# EAGLE board Master_Micro_Circuit_Manual (EAGLE 9.3.0)
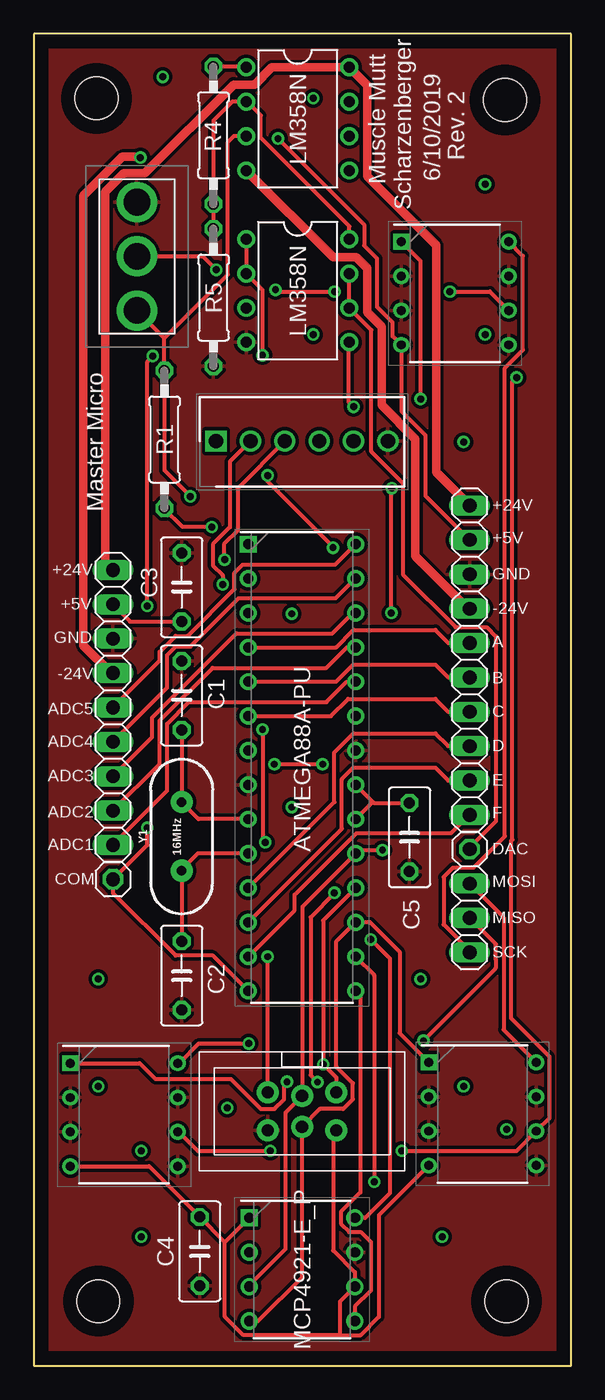
[diagram p0: board, top side]
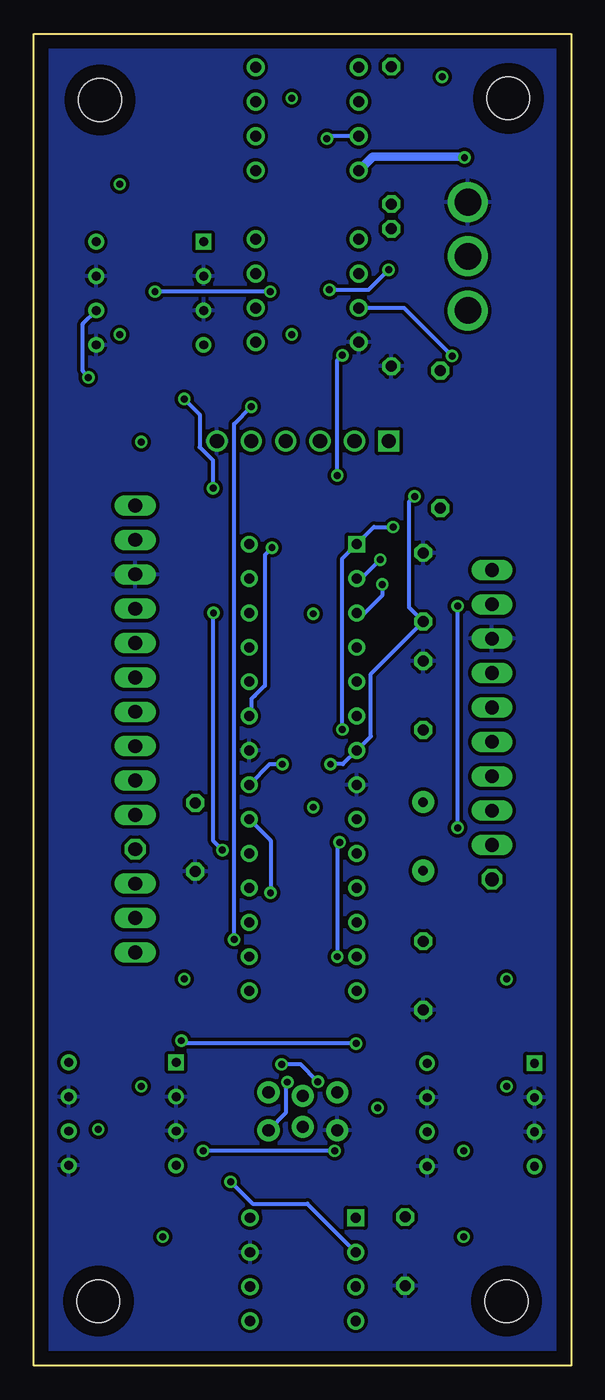
[diagram p1: board, bottom side, seen from below]

Size 39.69 x 98.42 mm. Coordinates in mm from the lower left corner, seen from the top.
Outline: 0,0 39.69,0 39.69,98.42 0,98.42 0,0
Copper layers (1*16): Top 0.035mm / dielectric 1.5mm / Bottom 0.035mm
Design rules "default": minimum track width 6mil, minimum drill 0.35mm, track to track 6mil, track to pad 6mil, pad to pad 6mil, via to via 6mil, smd to smd 6mil, copper to edge 40mil, drill to drill 6mil, minimum pad ring 10mil, minimum via ring 8mil, stop-mask expansion 4mil, vias tented up to drill 0mil, thermal gap 10mil
Net classes: 0 default: width 0.305 mm, drill 0.508 mm, clearance 0.254 mm
Holes 3.17 mm at 4.76,4.76 34.92,4.76 4.64,93.66 34.8,93.54

## Footprints (pad centres in the part's own frame; a part is rotated, then mirrored left to right if it is on the bottom)
C050-030X075 = drill 0.813 octagon: 1 -2.54,0; 2 2.54,0
DIP794W53P254L3467H457Q28N = drill 0.733 pad 1.133 square: 1 -3.969,16.51 | drill 0.733 pad 1.133: 2 -3.969,13.97; 3 -3.969,11.43; 4 -3.969,8.89; 5 -3.969,6.35; 6 -3.969,3.81; 7 -3.969,1.27; 8 -3.969,-1.27; 9 -3.969,-3.81; 10 -3.969,-6.35; 11 -3.969,-8.89; 12 -3.969,-11.43; 13 -3.969,-13.97; 14 -3.969,-16.51; 15 3.969,-16.51; 16 3.969,-13.97; 17 3.969,-11.43; 18 3.969,-8.89; 19 3.969,-6.35; 20 3.969,-3.81; 21 3.969,-1.27; 22 3.969,1.27; 23 3.969,3.81; 24 3.969,6.35; 25 3.969,8.89; 26 3.969,11.43; 27 3.969,13.97; 28 3.969,16.51
DIP794W46P254L959H508Q8N = drill 0.655 pad 1.055 square: 1 -3.97,3.81 | drill 0.655 pad 1.055: 2 -3.97,1.27; 3 -3.97,-1.27; 4 -3.97,-3.81; 5 3.97,-3.81; 6 3.97,-1.27; 7 3.97,1.27; 8 3.97,3.81
DIP781W56P254L950H533Q8N = drill 0.759 pad 1.159 square: 1 -3.905,3.81 | drill 0.759 pad 1.159: 2 -3.905,1.27; 3 -3.905,-1.27; 4 -3.905,-3.81; 5 3.905,-3.81; 6 3.905,-1.27; 7 3.905,1.27; 8 3.905,3.81
DIL08 = drill 0.813 pad 1.27: 1 -3.81,-3.81; 2 -1.27,-3.81; 3 1.27,-3.81; 4 3.81,-3.81; 5 3.81,3.81; 6 1.27,3.81; 7 -1.27,3.81; 8 -3.81,3.81
AVRISP-BOX = drill 0.9 pad 1.626: 1 -1.397,2.54; 2 1.397,2.54; 3 -1.143,0; 4 1.143,0; 5 -1.397,-2.54; 6 1.397,-2.54
SHDR6W87P0X254_1X6_1509X635X10 = drill 1.05 pad 1.575 square: 1 0,0 | drill 1.05 pad 1.575: 2 2.54,0; 3 5.08,0; 4 7.62,0; 5 10.16,0; 6 12.7,0
1X04 = drill 1.016 long: 1 -3.81,0; 2 -1.27,0; 3 1.27,0; 4 3.81,0
1X05 = drill 1.016 long: 1 -5.08,0; 2 -2.54,0; 3 0,0; 4 2.54,0; 5 5.08,0
1X01 = drill 1.016 octagon: 1 0,0
1X06 = drill 1.016 long: 1 -6.35,0; 2 -3.81,0; 3 -1.27,0; 4 1.27,0; 5 3.81,0; 6 6.35,0
1X03 = drill 1.016 long: 1 -2.54,0; 2 0,0; 3 2.54,0
0207/10 = drill 0.813 octagon: 1 -5.08,0; 2 5.08,0
1031211PEV = drill 1.972 pad 2.958: 1 0,0; 2 4,0; 3 8,0
HC49US = drill 0.7 pad 1.651: 1 -2.54,0; 2 2.54,0

## Placement (x,y rotation side)
C1  [C050-030X075]  10.92,49.53 90 top
C2  [C050-030X075]  10.92,28.83 270 top
C3  [C050-030X075]  10.92,57.53 90 top
C4  [C050-030X075]  12.26,8.45 270 top
C5  [C050-030X075]  27.75,39.05 270 top
IC1  ATMEGA88A-PU  [DIP794W53P254L3467H457Q28N]  19.81,44.2 0 top
IC2  TS12A4515P  [DIP794W46P254L959H508Q8N]  31.11,79.25 0 top
IC3  TS12A4515P  [DIP794W46P254L959H508Q8N]  6.67,18.54 0 top
IC4  MCP4921-E_P  [DIP781W56P254L950H533Q8N]  19.81,7.11 0 top
IC5  LM358N  [DIL08]  19.49,92.14 270 top
IC6  LM358N  [DIL08]  19.49,79.44 270 top
IC7  TS12A4515P  [DIP794W46P254L959H508Q8N]  33.15,18.61 0 top
ISP1  AVRISP-BOX  [AVRISP-BOX]  19.81,18.8 270 top
J1  22-23-2061  [SHDR6W87P0X254_1X6_1509X635X10]  13.46,68.33 0 top
JP1  [1X04]  5.84,54.99 270 top
JP2  [1X05]  5.84,43.56 270 top
JP3  [1X01]  5.84,35.94 0 top
JP4  [1X04]  32.19,59.75 270 top
JP5  [1X06]  32.19,47.05 270 top
JP6  [1X01]  32.19,38.16 0 top
JP7  [1X03]  32.19,33.08 270 top
R1  [0207/10]  9.65,68.45 270 top
R4  [0207/10]  13.27,90.93 270 top
R5  [0207/10]  13.27,78.93 270 top
S1  103-1211P-EV  [1031211PEV]  7.62,85.98 270 top
Y1  16MHz  [HC49US]  10.92,39.12 90 top

## Library data of the parts
C1-C5 ISP1 = adafruit
IC1 = SamacSys_Parts; DESCRIPTION: ATMEGA88A-PU, 8 bit AVR Microcontroller 20MHz 512 B, 8 kB Flash, 1 kB RAM, I2C 28-Pin PDIP; HEIGHT: 4.572mm; MANUFACTURER_NAME: Microchip; MANUFACTURER_PART_NUMBER: ATMEGA88A-PU; MOUSER_PART_NUMBER: 556-ATMEGA88A-PU
IC2 IC3 IC7 = SamacSys_Parts; DESCRIPTION: Low-Voltage, Low On-State Resistance SPST CMOS Analog Switches; HEIGHT: 5.08mm; MANUFACTURER_NAME: Texas Instruments; MANUFACTURER_PART_NUMBER: TS12A4515P
IC4 = SamacSys_Parts; DESCRIPTION: Microchip MCP4921-E/P, 12 bit Serial DAC, 8-Pin PDIP; HEIGHT: 5.334mm; MANUFACTURER_NAME: Microchip; MANUFACTURER_PART_NUMBER: MCP4921-E/P; MOUSER_PART_NUMBER: 579-MCP4921-E/P
IC5 IC6 = linear
J1 = SamacSys_Parts; DESCRIPTION: 2.54mm,header,KK,vert,Sn,frictn lock,6w Molex KK 254 Series, Series Number 6373, 2.54mm Pitch 6 Way 1 Row Straight PCB Header, Through Hole, Solder Termination; HEIGHT: 10.67mm; MANUFACTURER_NAME: Molex; MANUFACTURER_PART_NUMBER: 22-23-2061; MOUSER_PART_NUMBER: 538-22-23-2061
JP1-JP7 = pinhead
R1 R4 R5 = rcl; SPICEPREFIX: R
S1 = SamacSys_Parts; DESCRIPTION: Slide Switches SPDT 0.5A 50VDC; HEIGHT: 11mm; MANUFACTURER_NAME: Mountain Switch; MANUFACTURER_PART_NUMBER: 103-1211P-EV; MOUSER_PART_NUMBER: 103-1211P-EV; MOUSER_PRICE-STOCK: https://www.mouser.com/Search/Refine.aspx?Keyword=103-1211P-EV
Y1 = SparkFun-Clocks; PROD_ID: XTAL-08181; SF_ID: COM-00536

## Nets
+5V: C3.1 C4.1 C5.1 IC1.7 IC1.20 IC1.21 IC2.4 IC3.4 IC4.1 IC4.6 IC5.3 IC7.4 ISP1.2 JP1.2 JP4.2 R1.1 S1.3
+24V: IC5.8 JP1.1 JP4.1
-24V: IC5.4 JP1.4 JP4.4
A: IC1.4 JP5.1
ADC: IC1.23 IC6.1 IC6.2
B: IC1.5 JP5.2
C: IC1.6 JP5.3
CS: IC1.16 IC4.2
D: IC1.11 JP5.4
DAC: IC4.8 IC6.5
DEMUX_COM: IC6.6 IC6.7 JP6.1
E: IC1.12 JP5.5
F: IC1.13 JP5.6
GND: C1.2 C2.2 C3.2 C4.2 C5.2 IC1.8 IC1.22 IC2.2 IC2.3 IC2.5 IC2.7 IC3.2 IC3.3 IC3.5 IC3.7 IC4.7 IC6.4 IC7.2 IC7.3 IC7.5 IC7.7 ISP1.6 J1.6 JP1.3 JP4.3 R5.2 S1.1
MISO: IC1.18 IC3.1 ISP1.1
MISO_OUT: IC3.8 JP7.2
MOSI: IC1.17 IC4.4 IC7.1 ISP1.4
MOSI_OUT: IC7.8 JP7.1
MUX_COM: IC1.14 IC6.3 JP3.1
N$1: C2.1 IC1.10 Y1.1
N$2: IC5.1 R4.1
N$3: IC2.6 IC3.6 IC7.6 S1.2
N$4: IC5.2 IC6.8 R4.2 R5.1
N$5: IC1.15 IC4.5
N$11: C1.1 IC1.9 Y1.2
PC1: IC1.24 JP2.5
PC2: IC1.25 JP2.4
PC3: IC1.26 JP2.3
PC4: IC1.27 JP2.2
PC5: IC1.28 JP2.1
RESET: IC1.1 ISP1.5 R1.2
RX: IC1.2 J1.3
SCK: IC1.19 IC2.1 IC4.3 ISP1.3
SCK_OUT: IC2.8 JP7.3
TX: IC1.3 J1.2

## Tracks (layer width: path | path; a pad name or v marks a point on that pad's centre or on a via)
+5V  (via drill 0.51)
  Top 0.305: 22.61,2.26 15.48,2.26 14.11,3.62 14.11,9.13 | ISP1.2 22.12,17.16 22.12,8.51 23.72,6.91 IC4.6 22.61,4.73 22.61,2.26 | IC1.21 25.05,41.66 | IC1.20 25.05,41.66 | 14.11,9.13 C4.1 8.51,14.73 IC3.4 | IC4.1 14.11,9.13 | 25.05,41.66 25.11,41.59 C5.1 | v18.04,90.69 24.39,84.33 24.39,82.79 25.34,81.84 25.34,78.26 26.51,77.09 26.51,76.07 IC2.4 27.14,70.55 28.92,68.77 28.92,64.29 JP4.2 | v11.56,64.24 11.56,64.26 9.65,66.17 R1.1 9.65,75.95 | C3.1 7.11,54.99 JP1.2 | IC5.3 14.78,90.87 14.34,90.42 14.34,80.63 9.65,75.95 | 22.61,2.26 24.15,2.26 25.49,3.61 25.49,11.11 IC7.4 | v22.2,34.95 22.2,34.9 20.44,33.13 20.44,21.47 v20.95,20.95 | S1.3 9.65,75.95 | v17.77,44.45 v21.33,44.45
  Bottom 0.305: IC5.3 17.86,90.87 v18.04,90.69 | v11.56,64.24 v11.57,64.24 11.99,63.81 11.99,56.06 C3.1 14.8,51.12 14.8,46.51 IC1.7 16.86,44.45 v17.77,44.45 | v22.2,34.95 22.2,38.81 IC1.20 | v20.95,20.95 21.08,20.83 21.08,18.67 ISP1.2 | IC1.21 22.26,44.45 v21.33,44.45
+24V
  Top 0.61: JP1.1 5.28,59.36 5.28,86.75 6.65,88.12 8.21,88.12 14.76,94.67 16.31,94.67 17.59,95.95 IC5.8 24.62,94.63 24.62,87.9 29.72,82.8 29.72,66.04 JP4.1
-24V  (via drill 0.51)
  Top 0.61: IC5.4 15.7,88.33 22.1,81.93 23.81,81.93 24.62,81.11 24.62,77.86 25.69,76.8 25.69,70.99 28.19,68.49 28.19,59.82 32.07,55.94 JP4.4 | JP1.4 5.71,51.18 3.66,53.24 3.66,86.45 6.54,89.34 7.82,89.34 v7.87,89.28
  Bottom 0.61: IC5.4 14.67,89.34 7.94,89.34 v7.87,89.28
A
  Top 0.305: IC1.4 22.33,53.09 23.61,54.37 29.66,54.37 30.63,53.4 JP5.1
ADC  (via drill 0.51)
  Top 0.305: v17.27,65.79 17.27,65.34 22.1,60.52 v22.1,60.45 | IC6.1 IC6.2 16.89,79.5 v16.89,74.68
  Bottom 0.305: IC1.23 23.62,48.16 23.62,49.28 23.38,49.52 23.36,49.52 22.63,50.25 22.63,59.92 v22.1,60.45 | v17.27,65.79 17.27,74.3 v16.89,74.68
B
  Top 0.305: IC1.5 22.33,50.55 23.6,51.82 29.65,51.82 30.61,50.86 JP5.2
C
  Top 0.305: IC1.6 21.95,48.01 23.22,49.28 29.65,49.28 30.61,48.32 JP5.3
CS  (via drill 0.51)
  Top 0.305: IC1.16 25.15,28.86 v25.15,13.59
  Bottom 0.305: IC4.2 19.49,11.96 23.52,11.96 v25.15,13.59
D
  Top 0.305: IC1.11 22.2,41.66 22.2,45.33 23.6,46.74 29.65,46.74 30.61,45.78 JP5.4
DAC  (via drill 0.51)
  Top 0.305: v24.89,31.5 26.31,30.07 26.31,12.76 24.47,10.92 IC4.8 | v23.62,70.87 23.24,71.25 23.24,75.56 IC6.5
  Bottom 0.305: v24.89,31.5 24.89,69.6 v23.62,70.87
DEMUX_COM
  Top 0.305: IC6.7 IC6.6 24.94,76.53 24.94,67.56 27.3,65.2 27.3,58.42 31.15,54.57 33.44,54.57 34.12,53.89 34.12,40.22 32.19,38.29 JP6.1
E
  Top 0.305: IC1.12 22.75,39.68 22.75,43.35 23.6,44.2 29.65,44.2 30.61,43.24 JP5.5
F
  Top 0.305: IC1.13 19.27,33.66 19.27,34.79 23.84,39.36 30.84,39.36 JP5.6
GND
  pour Top: -1.27,99.69 -1.27,-1.27 41.27,-1.27 41.27,99.69
  pour Bottom: -1.27,99.69 -1.27,-1.27 41.34,-1.27 41.34,99.69
MISO  (via drill 0.51)
  Top 0.305: IC1.18 21.38,32.9 v21.38,22.27 22.35,21.3 ISP1.1 | IC3.1 7.81,22.35 8.98,21.18 14.56,21.18 16.77,18.97 17.78,18.97 18.49,19.69 18.49,20.77 v18.7,20.98
  Bottom 0.305: v18.7,20.98 19.99,22.27 v21.38,22.27
MISO_OUT  (via drill 0.51)
  Top 0.305: IC3.8 10.73,22.35 12.19,23.81 v15.88,23.81 | v28.79,24.03 34.12,29.36 34.12,30.06 34.12,31.15 JP7.2
  Bottom 0.305: v28.79,24.03 28.57,23.81 v15.88,23.81
MOSI
  Top 0.305: IC4.4 16.57,3.3 19.81,6.55 ISP1.4 21.13,18.97 22.86,18.97 23.57,19.69 23.57,20.87 22.35,22.09 22.35,31.37 23.75,32.77 IC1.17 24.84,32.77 27.02,30.59 27.02,24.57 IC7.1
MOSI_OUT
  Top 0.305: IC7.8 34.7,24.83 34.7,33.11 JP7.1
MUX_COM  (via drill 0.51)
  Top 0.305: IC1.14 13.23,30.3 10.48,30.3 5.84,34.94 JP3.1 8.38,38.48 v8.38,39.75 | v8.38,56.13 8.38,74.21 v8.79,74.61
  Bottom 0.305: v8.38,39.75 v8.38,56.13 | v8.79,74.61 12.33,78.16 15.67,78.16 IC6.3
N$1
  Top 0.305: IC1.10 12.1,37.85 10.92,36.67 Y1.1 C2.1
N$2
  Top 0.305: IC5.1 15.62,96.01 R4.1
N$3  (via drill 0.51)
  Top 0.305: v17.46,15.88 12.12,15.88 10.72,17.27 IC3.6 | v27.18,15.88 35.66,15.88 IC7.6 | IC7.6 38.1,18.32 38.1,20.29 38.1,22 38.1,22.01 38.1,22.82 35.26,25.67 35.26,38.79 35.36,38.88 35.36,72.72 v35.66,73.03 | IC7.6 | S1.2 12.49,81.98 v13.47,80.99 | v30.73,79.38 33.69,79.38 IC2.6 | v17.85,79.51 17.98,79.38 v22.23,79.38
  Bottom 0.305: v17.46,15.88 v27.18,15.88 | v35.66,73.03 35.66,73.09 36.07,73.5 36.07,76.99 IC2.6 | v17.85,79.51 14.96,79.51 v13.47,80.99 | v22.23,79.38 v30.73,79.38
N$4
  Top 0.305: R5.1 R4.2 13.27,92.01 14.67,93.41 IC5.2 15.75,93.41 16.76,92.39 16.76,90.74 23.3,84.2 IC6.8
N$5
  Top 0.305: IC1.15 24.13,27.34 24.13,12.81 22.68,11.35 22.68,10.49 23.29,9.88 24.15,9.88 24.89,9.14 24.89,5.55 23.72,4.37 IC4.5
N$6  (via drill 0.51)
  other vias: 19.05,55.56
N$7  (via drill 0.51)
  other vias: 14.29,19.05
N$8  (via drill 0.51)
  other vias: 7.94,9.53
N$9  (via drill 0.51)
  other vias: 30.16,9.53
N$10  (via drill 0.51)
  other vias: 4.76,28.57
N$11
  Top 0.305: IC1.9 12.16,40.39 10.92,41.62 Y1.2 C1.1
N$12  (via drill 0.51)
  other vias: 9.53,95.25
N$13  (via drill 0.51)
  other vias: 33.34,87.31
N$14  (via drill 0.51)
  other vias: 20.64,93.66
N$15  (via drill 0.51)
  other vias: 20.64,76.2
N$16  (via drill 0.51)
  other vias: 33.34,76.2
N$17  (via drill 0.51)
  other vias: 31.75,20.64
N$18  (via drill 0.51)
  other vias: 34.92,17.46
N$19  (via drill 0.51)
  other vias: 4.76,20.64
N$20  (via drill 0.51)
  other vias: 7.94,15.88
N$21  (via drill 0.51)
  other vias: 19.05,41.27
N$22  (via drill 0.51)
  other vias: 31.75,68.26
N$23  (via drill 0.51)
  other vias: 28.57,28.57
PC1
  Top 0.305: IC1.24 23.12,50.55 21.61,49.03 11.46,49.03 9.86,47.43 9.86,42.49 JP2.5
PC2
  Top 0.305: JP2.4 9.3,44.48 9.3,47.66 13.21,51.57 21.61,51.57 23.12,53.09 IC1.25
PC3
  Top 0.305: JP2.3 8.74,46.46 8.74,47.9 14.96,54.11 22.06,54.11 23.57,55.63 IC1.26
PC4
  Top 0.305: IC1.27 23.75,58.17 22.3,56.72 15.14,56.72 11.56,53.14 10.48,53.14 9.86,52.51 9.86,50.11 JP2.2
PC5
  Top 0.305: IC1.28 22.26,59.19 15.42,59.19 14.82,58.59 14.82,57.38 11.36,53.92 10.48,53.92 9.3,52.74 9.3,52.09 JP2.1
RESET  (via drill 0.51)
  Top 0.305: ISP1.5 v17.27,30.23 | v17.1,38.67 16.91,38.86 16.91,47 v16.89,47.02 | v13.14,61.98 10.99,61.98 9.65,63.31 R1.2
  Bottom 0.305: v17.27,30.23 17.29,30.24 17.29,38.48 v17.1,38.67 | v13.14,61.98 14.57,61.98 IC1.1 16.89,59.66 v16.89,47.02
RX  (via drill 0.51)
  Top 0.305: J1.3 15.05,64.83 15.05,61.73 14.04,60.72 14.04,59.62 v14.1,59.56
  Bottom 0.305: v14.1,59.56 15.49,58.17 IC1.2
SCK  (via drill 0.51)
  Top 0.305: IC4.3 15.91,5.94 18.61,8.64 18.61,17.14 18.59,17.15 18.59,18.72 ISP1.3 19.83,19.96 19.83,33.9 IC1.19 24.04,38.1 v25.76,38.1 | v26.42,55.63 26.42,64.82 v26.44,64.84 | v28.57,71.44 28.57,81.63 IC2.1
  Bottom 0.305: v25.76,38.1 26.42,38.76 v26.42,55.63 | v26.44,64.84 26.44,66.88 27.43,67.87 27.43,70.29 v28.57,71.44
SCK_OUT
  Top 0.305: JP7.3 32.19,30.67 30.26,32.6 30.26,36.11 30.95,36.79 32.48,36.79 34.8,39.12 34.8,73.72 36.13,75.06 36.13,82.01 IC2.8 | IC2.8
TX  (via drill 0.51)
  Top 0.305: J1.2 14.49,66.81 14.49,61.96 13.23,60.7 13.23,59.14 13.95,58.42 v13.95,57.73
  Bottom 0.305: v13.95,57.73 13.95,56.91 15.23,55.63 IC1.3

## Text on the board
tPlace: Rev. 2 | 6/10/2019 | Muscle Mutt | Scharzenberger | Master Micro | +24V | +5V | +24V | GND | +5V | -24V | GND | A | -24V | B | ADC5 | C | ADC4 | D | ADC3 | E | ADC2 | F | ADC1 | DAC | COM | MOSI | MISO | SCK